# Altium PCB RT_SUPER_HOST_A.PCBdoc
Units mil, origin at the board's own origin, x right, y up, seen from the top; angles counter-clockwise.
Board outline 6500 x 5500 mil, 4 copper layers (Top Layer, GND, PWR, Bottom Layer), stack 39.556 mil thick; 92 components, 54 nets, 340 pads, 0 vias.
Unrouted connection lines stored in the file: 202.
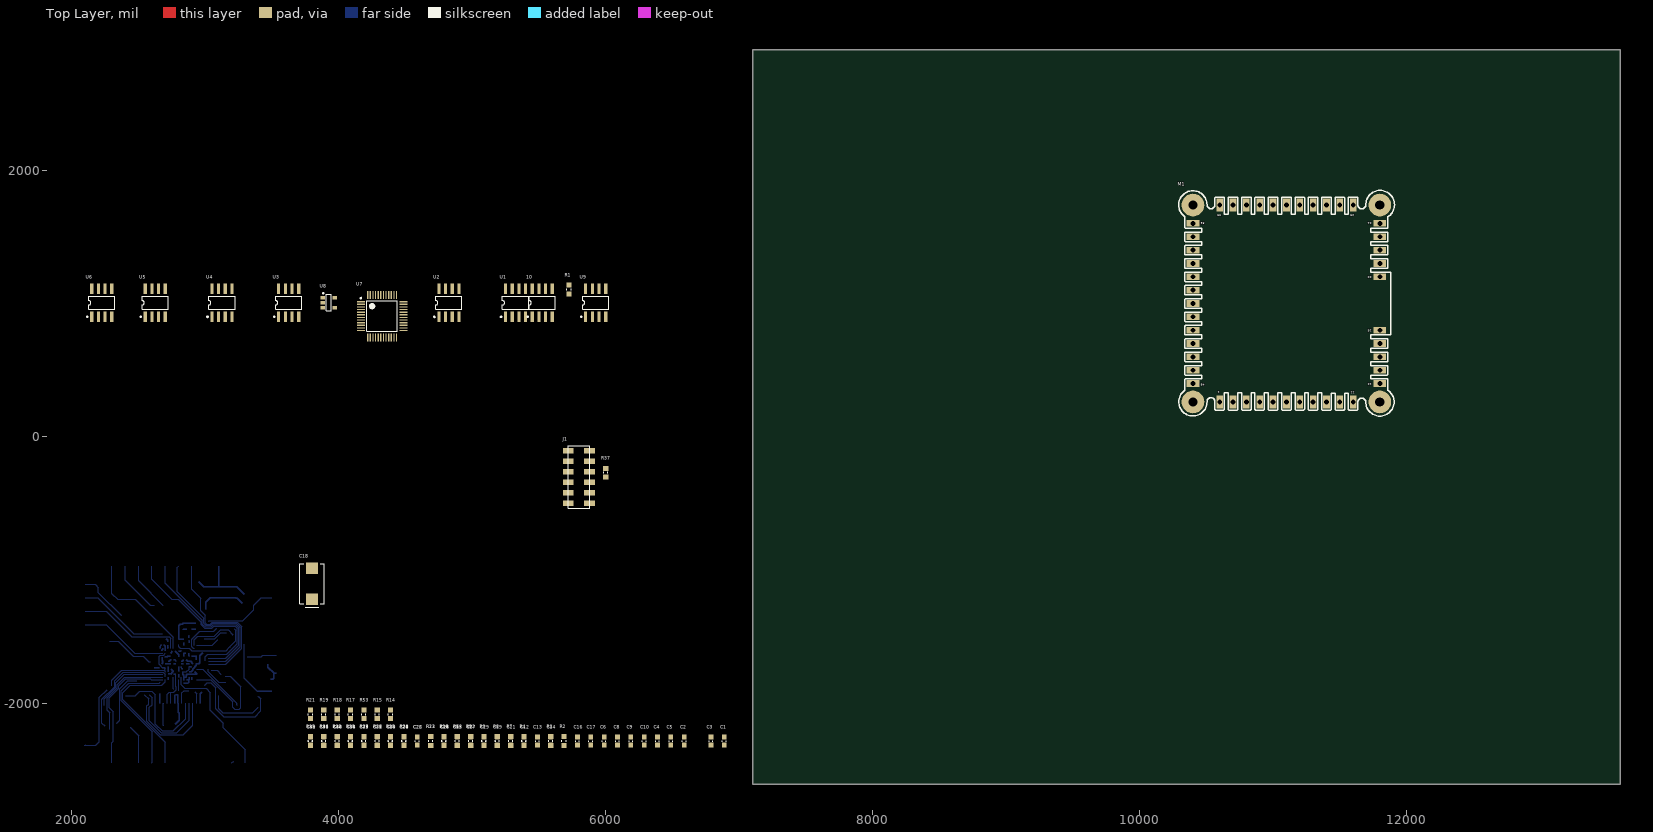
[diagram p0: Top Layer view]
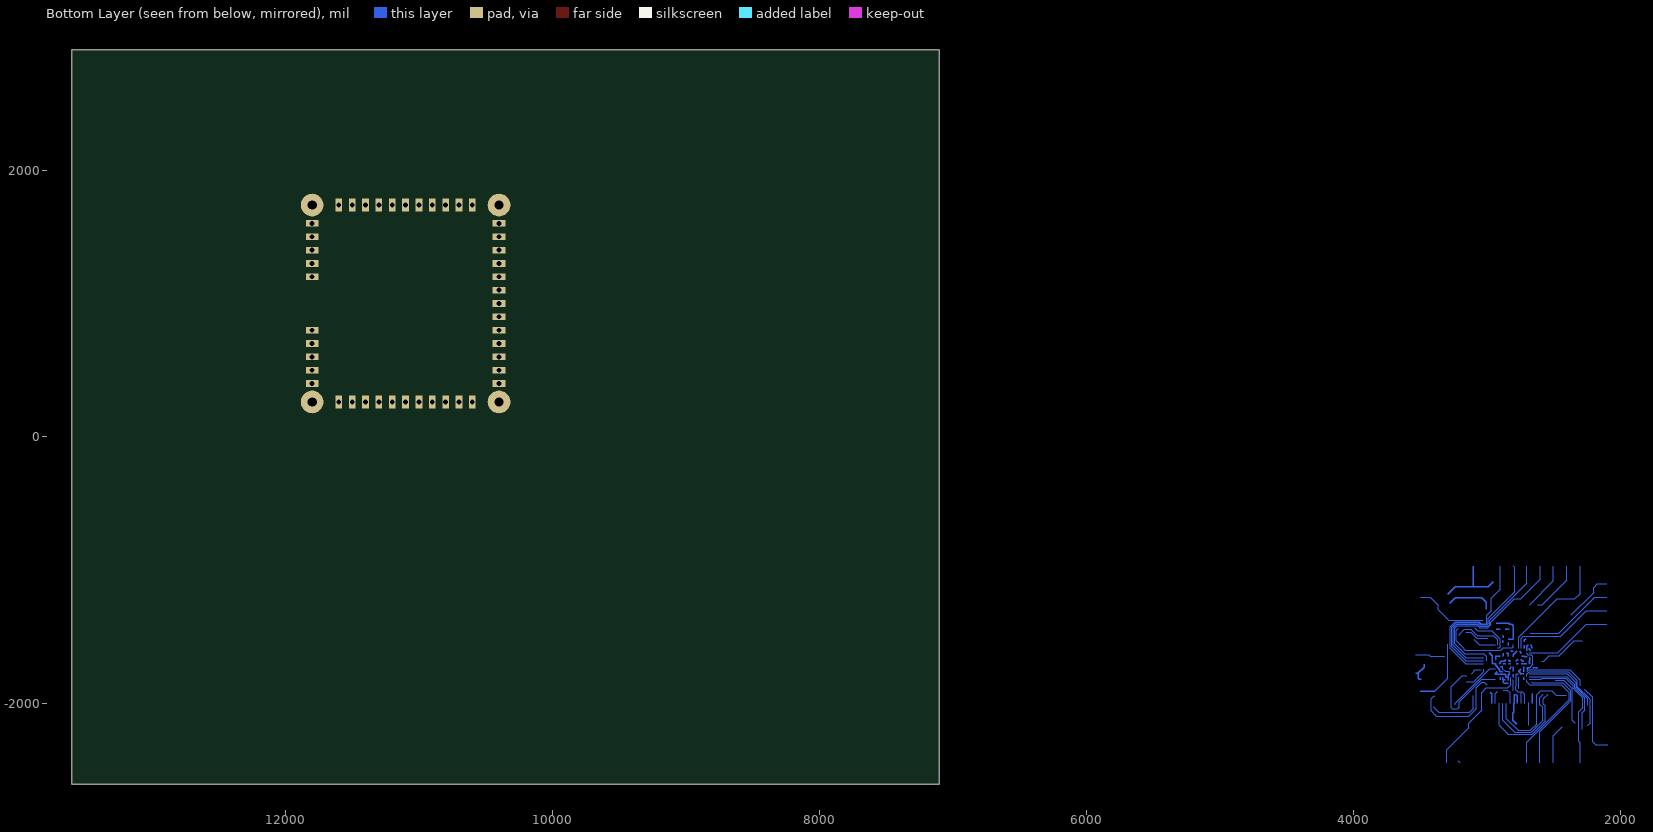
[diagram p1: Bottom Layer view, seen from below]
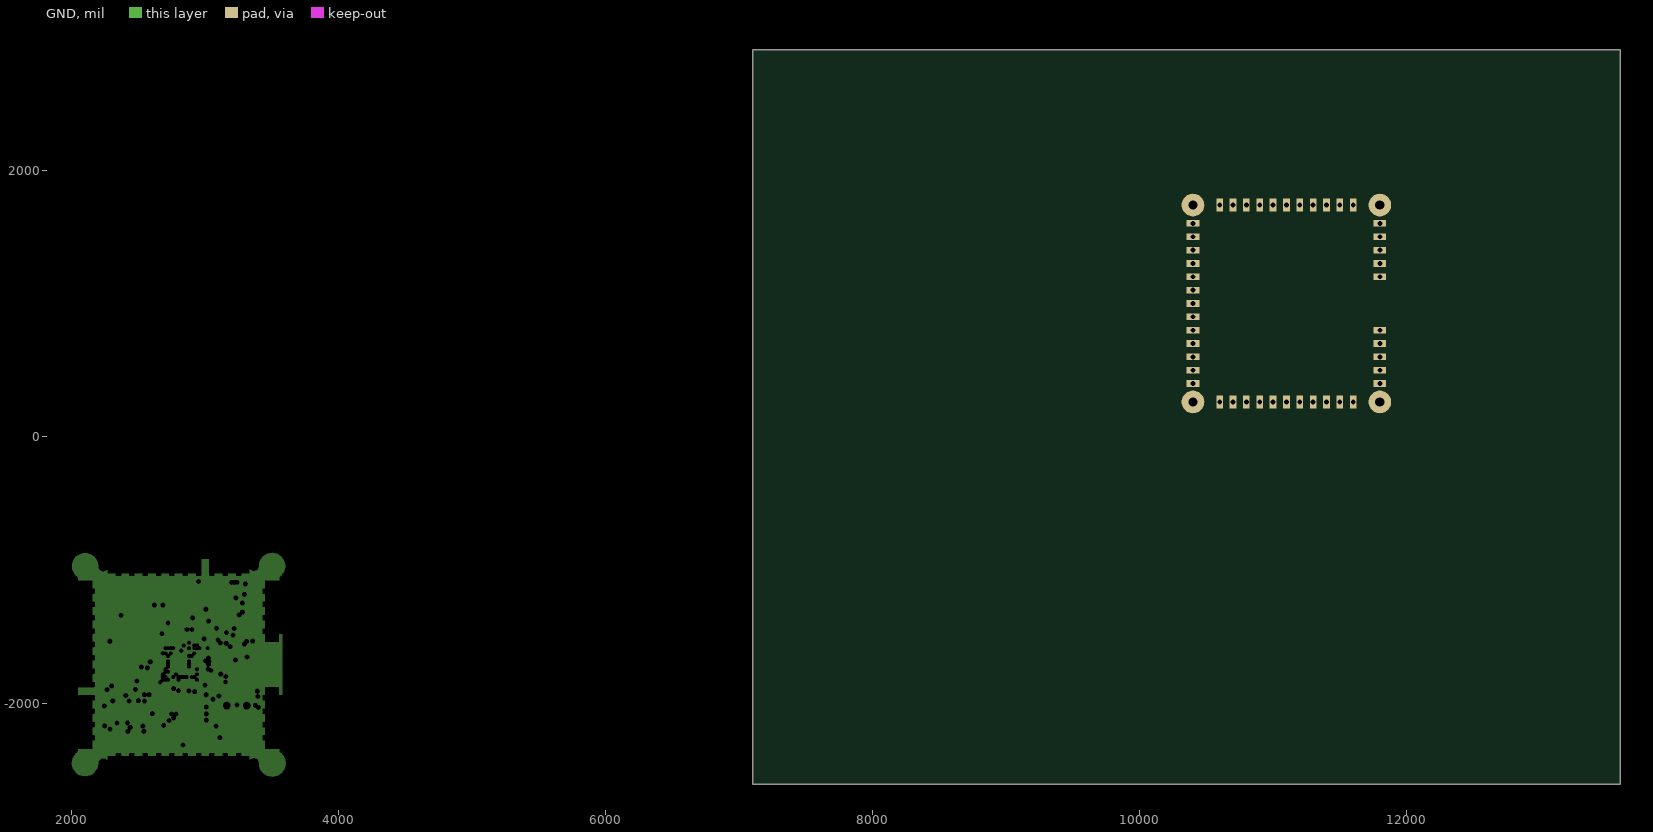
[diagram p2: GND]
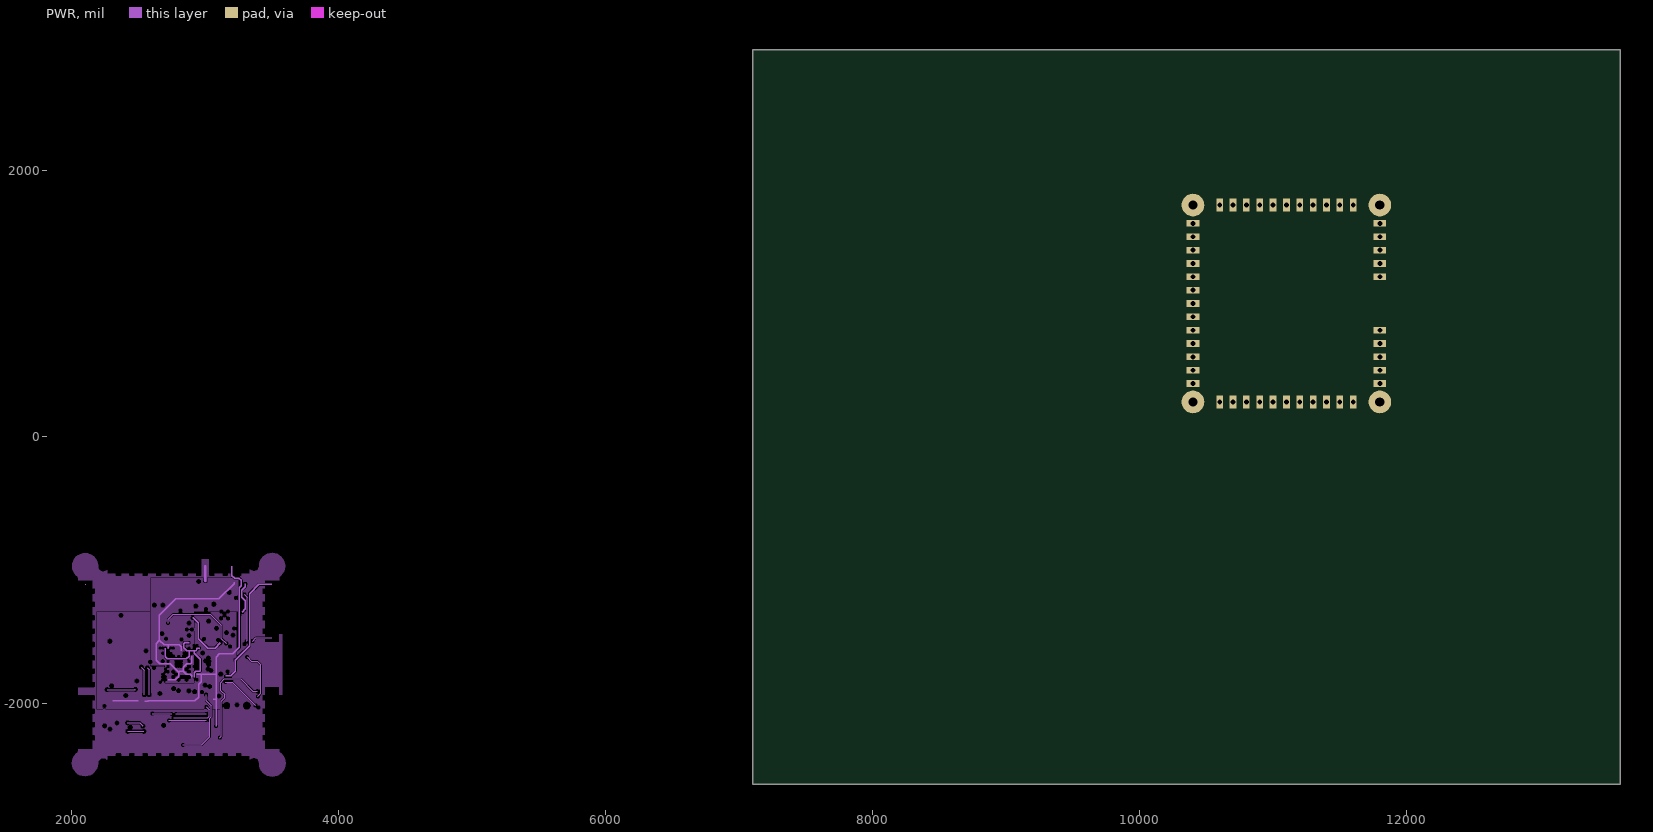
[diagram p3: PWR]

## Layer stack, top to bottom
Top Solder: solder mask 0.4, Solder Resist, Dk 3.5
Top Layer: signal copper 1.4
Dielectric 1: prepreg 2.8, PP-006, Dk 4.1
GND: signal copper 1.378
Dielectric1: dielectric 28.4, FR-4, Dk 4.8
PWR: signal copper 1.378
Dielectric 2: prepreg 2.8, PP-006, Dk 4.1
Bottom Layer: signal copper 1.4
Bottom Solder: solder mask 0.4, Solder Resist, Dk 3.5

## Board outline
7100,-2600 13600,-2600 13600,2900 7100,2900

## Design rules (kind name [scope] priority, off if disabled: settings)
Clearance [All] p1: gap=5 ignorepadtopadclearanceinfootprint=FALSE except(8: Arc-Poly Track-Poly SMDPad-Poly THPad-Poly Via-Poly Fill-Poly Poly-Poly)
ComponentClearance ComponentClearance_1 [HasFootprint('ER-TFT1.54-1')] p1: gap=0 collisioncheckmode=3 verticalgap=0 showdistances=FALSE
ComponentClearance [All] p2: gap=10 collisioncheckmode=3 verticalgap=10 showdistances=FALSE
PlaneClearance [All] p1: clearance=10
PolygonConnect PolygonConnect_2 [InNet('GND')] p1: thpad.connectstyle=Direct thpad.reliefconductorwidth=10 thpad.reliefentries=4 thpad.polygonreliefangle="90 Angle" thpad.airgapwidth=10 smdpad.connectstyle=Relief smdpad.reliefconductorwidth=10 smdpad.reliefentries=4 smdpad.polygonreliefangle="90 Angle" smdpad.airgapwidth=10 via.connectstyle=Direct via.reliefconductorwidth=10 via.reliefentries=4 via.polygonreliefangle="90 Angle" via.airgapwidth=10
PolygonConnect PolygonConnect_1 [IsVia] p2: connectstyle=Direct reliefconductorwidth=10 reliefentries=4 polygonreliefangle="90 Angle" airgapwidth=10
PolygonConnect [All] p3: connectstyle=Relief reliefconductorwidth=10 reliefentries=4 polygonreliefangle="90 Angle" airgapwidth=5
RoutingVias [All] p1: holewidth=12 width=26 viastyle="Through Hole" minholewidth=6 minwidth=6 maxholewidth=50 maxwidth=75
SilkToSolderMaskClearance SilkscreenOverComponentPads [IsPad] p1: minsilkscreentomaskgap=10 clearancetoexposedcopper=TRUE
SolderMaskExpansion [All] p1: expansion=4 istentingtop=FALSE
Width [All] p1: maxlimit=200 minlimit=5 preferedwidth=5
27 further rules are at their usual default settings.

## Classes and differential pairs
component class U_ADC_IN: 10 C1 C2 C3 C4 C5 C6 C8 C9 C10 C11 C12 C13 C14 C15 C16 C17 C18 C19 C20 C21 C22 C23 C24 C25 C26 C27 C28 C29 C30 C31 C32 C33 C34 C35 C36 C37 C38 C39 C40 C41 C42 R1 R2 R3 R4 R7 R8 R9 R12 R13 R14 R15 R16 R17 R18 R19 R21 R23 R24 R25 R28 R29 R30 R33 R34 R35 R37 R53 U1 U2 U3 U4 U5 U6 U7 U8 U9
component class RT_SUPER_HOST_A: J1 M1

## Components (designator, comment, footprint, x,y, rotation, side; value= is the part's Value field where it differs from the comment)
10 "OPA2340UA/2K5" "SOIC 8" 5525,1005.31 r0 top
C1 "1000pF" C0603_0.90MM_MD 6888.44,-2278.04 r90 top
C2 "0.1µF" C0603_0.90MM_MD 6588.44,-2278.04 r90 top
C3 "0.1µF" C0603_0.90MM_MD 6788.44,-2278.04 r90 top
C4 "0.1µF" C0603_0.90MM_MD 6388.44,-2278.04 r90 top
C5 "0.1µF" C0603_0.90MM_MD 6488.44,-2278.04 r90 top
C6 "0.1µF" C0603_0.90MM_MD 5988.44,-2278.04 r90 top
C7 "2000pF" C0603_MD 4988.44,-2278.04 r90 top
C8 "0.1µF" C0603_0.90MM_MD 6088.44,-2278.04 r90 top
C9 "0.1µF" C0603_0.90MM_MD 6188.44,-2278.04 r90 top
C10 "0.1µF" C0603_0.90MM_MD 6288.44,-2278.04 r90 top
C11 "0.1µF" C0603_0.90MM_MD 5288.44,-2278.04 r90 top
C12 "0.1µF" C0603_0.90MM_MD 5388.44,-2278.04 r90 top
C13 "0.1µF" C0603_0.90MM_MD 5488.44,-2278.04 r90 top
C14 "0.1µF" C0603_0.90MM_MD 5588.44,-2278.04 r90 top
C15 "2000pF" C0603_MD 4888.44,-2278.04 r90 top
C16 "0.1µF" C0603_0.90MM_MD 5788.44,-2278.04 r90 top
C17 "0.1µF" C0603_0.90MM_MD 5888.44,-2278.04 r90 top
C18 "220µF" C_TANT_D_HD 3800,-1100 r90 top
C19 "10000pF" C0603_0.90MM_MD 5188.44,-2278.04 r90 top
C20 "10000pF" C0603_0.90MM_MD 4388.44,-2278.04 r90 top
C21 "0.1µF" C0603_0.90MM_MD 4488.44,-2278.04 r90 top
C22 "1µF" C0603_0.90MM_MD 4588.44,-2278.04 r90 top
C23 "10000pF" C0603_0.90MM_MD 4788.44,-2278.04 r90 top
C24 "2000pF" C0603_MD 4788.44,-2278.04 r90 top
C25 "0.1µF" C0603_0.90MM_MD 4888.44,-2278.04 r90 top
C26 "2000pF" C0603_MD 4588.44,-2278.04 r90 top
C27 "0.1µF" C0603_0.90MM_MD 4988.44,-2278.04 r90 top
C28 "2000pF" C0603_MD 4488.44,-2278.04 r90 top
C29 "10000pF" C0603_0.90MM_MD 5088.44,-2278.04 r90 top
C30 "2000pF" C0603_MD 4388.44,-2278.04 r90 top
C31 "2000pF" C0603_MD 4288.44,-2278.04 r90 top
C32 "10000pF" C0603_0.90MM_MD 4288.44,-2278.04 r90 top
C33 "2000pF" C0603_MD 4188.44,-2278.04 r90 top
C34 "2000pF" C0603_MD 4088.44,-2278.04 r90 top
C35 "0.1µF" C0603_0.90MM_MD 4188.44,-2278.04 r90 top
C36 "2000pF" C0603_MD 3988.44,-2278.04 r90 top
C37 "2000pF" C0603_MD 3888.44,-2278.04 r90 top
C38 "10000pF" C0603_0.90MM_MD 4088.44,-2278.04 r90 top
C39 "2000pF" C0603_MD 3788.44,-2278.04 r90 top
C40 "10000pF" C0603_0.90MM_MD 3988.44,-2278.04 r90 top
C41 "10000pF" C0603_0.90MM_MD 3888.44,-2278.04 r90 top
C42 "10000pF" C0603_0.90MM_MD 3788.44,-2278.04 r90 top
J1 "87759-1250" 87759-1250 5800,-300 r90 top
M1 "SUPERMONKEY" SUPERMONKEY 11100,1000 r180 top
R1 "4.7M" R0603_MD 5725,1105.31 r90 top
R2 "51" R0603_MD 5688.44,-2278.04 r90 top
R3 "100k" R0603_MD 5588.44,-2278.04 r90 top
R4 "51" R0603_MD 5388.44,-2278.04 r90 top
R5 "4.7M" R0603_MD 4988.44,-2278.04 r90 top
R6 "4.7M" R0603_MD 4888.44,-2278.04 r90 top
R7 "51" R0603_MD 5288.44,-2278.04 r90 top
R8 "100k" R0603_MD 5188.44,-2278.04 r90 top
R9 "51" R0603_MD 5088.44,-2278.04 r90 top
R10 "4.7M" R0603_MD 4788.44,-2278.04 r90 top
R11 "4.7M" R0603_MD 4688.44,-2278.04 r90 top
R12 "51" R0603_MD 4988.44,-2278.04 r90 top
R13 "100k" R0603_MD 4888.44,-2278.04 r90 top
R14 "1k" R0603_MD 4388.44,-2078.04 r90 top
R15 "1k" R0603_MD 4288.44,-2078.04 r90 top
R16 "51" R0603_MD 4788.44,-2278.04 r90 top
R17 "1k" R0603_MD 4088.44,-2078.04 r90 top
R18 "1k" R0603_MD 3988.44,-2078.04 r90 top
R19 "1k" R0603_MD 3888.44,-2078.04 r90 top
R20 "4.7M" R0603_MD 4488.44,-2278.04 r90 top
R21 "1k" R0603_MD 3788.44,-2078.04 r90 top
R22 "4.7M" R0603_MD 4388.44,-2278.04 r90 top
R23 "51" R0603_MD 4688.44,-2278.04 r90 top
R24 "100k" R0603_MD 4488.44,-2278.04 r90 top
R25 "51" R0603_MD 4388.44,-2278.04 r90 top
R26 "4.7M" R0603_MD 4288.44,-2278.04 r90 top
R27 "4.7M" R0603_MD 4188.44,-2278.04 r90 top
R28 "51" R0603_MD 4288.44,-2278.04 r90 top
R29 "100k" R0603_MD 4188.44,-2278.04 r90 top
R30 "51" R0603_MD 4088.44,-2278.04 r90 top
R31 "4.7M" R0603_MD 4088.44,-2278.04 r90 top
R32 "4.7M" R0603_MD 3988.44,-2278.04 r90 top
R33 "51" R0603_MD 3988.44,-2278.04 r90 top
R34 "100k" R0603_MD 3888.44,-2278.04 r90 top
R35 "51" R0603_MD 3788.44,-2278.04 r90 top
R36 "4.7M" R0603_MD 3888.44,-2278.04 r90 top
R37 "4.7M" R0603_MD 6000,-267.52 r90 top
R53 "1k" R0603_MD 4188.44,-2078.04 r90 top
U1 "OPA2340UA/2K5" "SOIC 8" 5325,1005.31 r0 top
U2 "OPA2340UA/2K5" "SOIC 8" 4825,1005.31 r0 top
U3 "OPA2340UA/2K5" "SOIC 8" 3625,1005.31 r0 top
U4 "OPA2340UA/2K5" "SOIC 8" 3125,1005.31 r0 top
U5 "OPA2340UA/2K5" "SOIC 8" 2625,1005.31 r0 top
U6 "OPA2340UA/2K5" "SOIC 8" 2225,1005.31 r0 top
U7 "CS5366-DQZ" TSQFP50P900X900X145-48L 4325,905.31 r0 top
U8 "SN74AHC1G125DBVR" SOT23-5 3925,1005.31 r0 top
U9 "OPA2340UA/2K5" "SOIC 8" 5925,1005.31 r0 top

## Footprints (in the part's own frame and the unit in brackets; to place one, negate y for a bottom-side part, rotate by r counter-clockwise, add the part's x,y. Pads: shape width x height; smd on the part's side, far side on the other; paste and mask are expansions set on the pad)
87759-1250 [mm] "CONN HEADER 12POS 2MM VERT SMD"
  rect 1x2 smd: 1(-5,-2) 2(-5,2) 3(-3,-2) 4(-3,2) 5(-1,-2) 6(-1,2) 7(1,-2) 8(1,2) 9(3,-2) 10(3,2) 11(5,-2) 12(5,2)
  round 0 hole 1.2 unplated: M1(-4,0) M2(4,0)
  silkscreen extent -5.92,-2.02 5.97,2.03, body extent -5.92,-2.75 5.98,2.75, height 6.45
C0603_0.90MM_MD [mm] "Capacitor 0603 - Medium Density"
  rect 0.95x0.9 smd: 1(-0.775,0) 2(0.775,0)
  silkscreen extent -0.1,-0.35 0.1,0.35, body extent -0.8,-0.4 0.8,0.4, height 0.9
C0603_MD [mm] "Capacitor 0603 - Medium Density"
  rect 0.95x0.9 smd: 1(-0.775,0) 2(0.775,0)
  silkscreen extent -0.1,-0.35 0.1,0.35, body extent -0.8,-0.4 0.8,0.4, height 0.56
C_TANT_D_HD [mm] "Molded Capacitor, 2-Leads, Body 7.3x4.3mm, IPC High Density"
  rect 2.2x2.35 smd: 1(-2.925,0) 2(2.925,0)
  silkscreen extent -4.44,-2.3 3.8,2.3, body extent -3.65,-2.15 3.65,2.15, height 2.8
R0603_MD [mm] "0603 Resistor - Medium Density"
  rect 0.95x1 smd: 1(-0.825,0) 2(0.825,0)
  silkscreen extent -0.15,-0.4 0.15,0.4, body extent -0.8,-0.4 0.8,0.4, height 0.46
"SOIC 8" [mm]
  rect 0.6x2.05 smd: 1(-1.905,-2.675) 2(-0.635,-2.675) 3(0.635,-2.675) 4(1.905,-2.675) 5(1.905,2.675) 6(0.635,2.675) 7(-0.635,2.675) 8(-1.905,2.675)
  silkscreen extent -2.88,-2.8 2.5,1.25, body extent -2.49,-3.19 2.51,3.14, height 1.88
SOT23-5 [mm] "SOT23, 5-Leads, Body 3.1x2.6mm (max), Pitch 0.95mm, IPC High Density"
  rect 0.85x0.6 smd: 1(-1.125,0.95) 2(-1.125,0) 3(-1.125,-0.95) 4(1.125,-0.95) 5(1.125,0.95)
  silkscreen extent -1.15,-1.5 0.5,1.92, body extent -1.38,-1.45 1.32,1.45, height 1.15
SUPERMONKEY [mil]
  rect 50x95 hole 36: 1(500,737.5) 2(400,737.5) 3(300,737.5) 4(200,737.5) 5(100,737.5) 6(0,737.5) 7(-100,737.5) 8(-200,737.5) 9(-300,737.5) 10(-400,737.5) 11(-500,737.5) 25(-500,-737.5) 26(-400,-737.5) 27(-300,-737.5) 28(-200,-737.5) 29(-100,-737.5) 30(0,-737.5) 31(100,-737.5) 32(200,-737.5) 33(300,-737.5) 34(400,-737.5) 35(500,-737.5)
  round 170 hole 70: 2(-700,737.5) 2(-700,-737.5) 2(700,737.5) 2(700,-737.5)
  rect 95x50 hole 36: 12(-700,600) 13(-700,500) 14(-700,400) 15(-700,300) 16(-700,200) 20(-700,-200) 21(-700,-300) 22(-700,-400) 23(-700,-500) 24(-700,-600) 36(700,-600) 37(700,-500) 38(700,-400) 39(700,-300) 40(700,-200) 41(700,-100) 42(700,0) 43(700,100) 44(700,200) 45(700,300) 46(700,400) 47(700,500) 48(700,600)
  Top Layer lines w5: 700,-400 696.57,-396.57 ; 505,-732.5 500,-737.5 ; 103,-734.5 100,-737.5 ; -400,-737.5 -409.45,-728.05 ; -686.73,-386.73 -700,-400 ; -697,-303 -700,-300 ; -698.35,401.65 -700,400 ; -699.69,-600.31 -700,-600 ; -699.88,199.88 -700,200
  Top Layer lines w20: 500,737.5 498,735.5
  silkscreen extent -810,-847 807,844
TSQFP50P900X900X145-48L [mm] "TSQFP, 48-Leads, Body 9.1x9.1mm (max), Pitch 0.50mm, IPC High Density"
  rect 1.5x0.25 smd: 1(-4.05,2.75) 2(-4.05,2.25) 3(-4.05,1.75) 4(-4.05,1.25) 5(-4.05,0.75) 6(-4.05,0.25) 7(-4.05,-0.25) 8(-4.05,-0.75) 9(-4.05,-1.25) 10(-4.05,-1.75) 11(-4.05,-2.25) 12(-4.05,-2.75) 25(4.05,-2.75) 26(4.05,-2.25) 27(4.05,-1.75) 28(4.05,-1.25) 29(4.05,-0.75) 30(4.05,-0.25) 31(4.05,0.25) 32(4.05,0.75) 33(4.05,1.25) 34(4.05,1.75) 35(4.05,2.25) 36(4.05,2.75)
  rect 0.25x1.5 smd: 13(-2.75,-4.05) 14(-2.25,-4.05) 15(-1.75,-4.05) 16(-1.25,-4.05) 17(-0.75,-4.05) 18(-0.25,-4.05) 19(0.25,-4.05) 20(0.75,-4.05) 21(1.25,-4.05) 22(1.75,-4.05) 23(2.25,-4.05) 24(2.75,-4.05) 37(2.75,4.05) 38(2.25,4.05) 39(1.75,4.05) 40(1.25,4.05) 41(0.75,4.05) 42(0.25,4.05) 43(-0.25,4.05) 44(-0.75,4.05) 45(-1.25,4.05) 46(-1.75,4.05) 47(-2.25,4.05) 48(-2.75,4.05)
  silkscreen extent -4.17,-2.9 2.9,3.55, body extent -4.5,-4.5 4.5,4.5, height 1.4

## Part data
10 U1 U2 U3 U4 U5 U6 U9: "IC OPAMP GP 5.5MHZ RRO 8SOIC", Current - Input Bias=0.2pA, Current - Output / Channel=50mA, Current - Supply=750µA, Manufacturer="Texas Instruments", Operating Temperature="-40°C ~ 85°C", Package / Case="8-SOIC (0.154\", 3.90mm Width)", Supplier Device Package=8-SOIC, Supplier Part Number 1=296-26254-1-ND, Voltage - Input Offset=150µV, Voltage - Supply, Single/Dual (±)="2.5 V ~ 5.5 V", -3db Bandwidth=-, Amplifier Type="General Purpose", Category="Integrated Circuits (ICs)", ComponentLink1Description=http://www.ti.com/lit/ds/symlink/opa2340.pdf, ComponentLink1URL=http://www.ti.com/lit/ds/symlink/opa2340.pdf, Gain Bandwidth Product=5.5MHz, Manufacturer Part Number=OPA2340UA/2K5, Mounting Type="Surface Mount", Number of Circuits=2, Output Type=Rail-to-Rail, Packaging="Cut Tape (CT)", Pricing 1="1=3.51, 10=3.148, 25=2.8304, 100=2.5742, 250=2.3302, 500=2.0862, 750=1.891, 1000=1.7568 (USD)", RoHS="RoHS Compliant", Slew Rate="6 V/µs", Stock 1=1425, Supplier 1=Digi-Key
C1: library part CL10C102FB8NNNC, "CAP CER 1000PF 50V C0G/NP0 0603", Manufacturer="Samsung Electro-Mechanics", Operating Temperature="-55°C ~ 125°C", Package=0603, Ratings=-, Supplier Part Number 1=1276-6824-1-ND, Temperature Coefficient="C0G, NP0", Tolerance=±1%, Voltage - Rated=50V, Category=Capacitors, ComponentLink1Description="Datasheet (Internal)", ComponentLink1URL=datasheets\Samsung\CL05B153KB5VPNC.pdf.pdf, ComponentLink2Description="Datasheet (External)", ComponentLink2URL=http://www.samsungsem.com/kr/support/product-search/mlcc/__icsFiles/afieldfile/2017/05/25/CL05B153KB5VPNC.pdf, Manufacturer Part Number=CL10C102FB8NNNC, Substitution Notes="1000pF , 50V , ±1% , C0G, NP0 , -55°C ~ 125°C,0603", Supplier 1=Digikey, Thickness (Max)=0.90MM
C2 C3 C4 C5 C6 C8 C9 C10 C11 C12 C13 C14 C16 C17 C21 C25 C27 C35: library part CGA3E2X7R1H104K080AA, "CAP CER 0.1UF 50V X7R 0603", Manufacturer="TDK Corporation", Operating Temperature="-55°C ~ 125°C", Package=0603, Ratings=AEC-Q200, Supplier Part Number 1=445-5666-1-ND, Temperature Coefficient=X7R, Tolerance=±10%, Voltage - Rated=50V, Category=Capacitors, ComponentLink1Description="Datasheet (Internal)", ComponentLink1URL=datasheets\TDK\mlcc_automotive_general_en.pdf, ComponentLink2Description="Datasheet (External)", ComponentLink2URL=https://product.tdk.com/info/en/catalog/datasheets/mlcc_automotive_general_en.pdf, Features=-, Manufacturer Part Number=CGA3E2X7R1H104K080AA, Substitution Notes="0.1µF , 50V , ±10% , X7R , -55°C ~ 125°C , AEC-Q200 , 0603", Supplier 1=Digikey, Thickness (Max)=0.90MM
C7 C15 C24 C26 C28 C30 C31 C33 C34 C36 C37 C39: library part GRM1885C1H202JA01D, "CAP CER 2000PF 50V 5% NP0 0603", Manufacturer="Murata Electronics North America", Operating Temperature="-55°C ~ 125°C", Package="0603 (1608 Metric)", Ratings=-, Sort Value=2000, Sort Value Package=0603_2000, Supplier Package=0603, Supplier Part Number 1=490-1458-1-ND, Temperature Coefficient="C0G- NP0", Tolerance=±5%, Value_Voltage="2000pF  50V", Voltage - Rated=50V, Applications="General Purpose", Capacitance=2000pF, Category=Capacitors, ComponentLink1Description="\\altium.sil.arl.psu.edu\Libraries\datasheets\Murata Electronics North America\GRM1885C1H202JA01%23.pdf", ComponentLink1URL=http://search.murata.co.jp/Ceramy/image/img/A01X/G101/ENG/GRM1555C1HR60WA01-01.pdf, ComponentLink2Description="External Datasheet", ComponentLink2URL=http://psearch.murata.com/capacitor/product/GRM1885C1H202JA01%23.pdf, Features=-, Height - Seated (Max)=-, Lead Spacing=-, Lead Style=-, Manufacturer Part Number=GRM1885C1H202JA01D, Mounting Type="Surface Mount- MLCC", Packaging="Cut Tape (CT)", Pricing="1 = 0.13  ;  10 = 0.09  ;  50 = 0.0518  ;  100 = 0.0428  ;  250 = 0.036  ;  500 = 0.03016  ;  1000 = 0.02475 (USD)", Sales Status=Active, Size / Dimension="0.063\" L x 0.031\" W (1.60mm x 0.80mm)", Stocked=0, Supplier 1=Digi-Key, Thickness=90, Thickness (Max)="0.035\" (0.90mm)"
C18: library part T495D227K010ATE125, "CAP TANT 220UF 10V 10% 2917", ESR (Equivalent Series Resistance)="125 mOhm", Lifetime @ Temp#=-, Manufacturer=Kemet, Operating Temperature="-55°C ~ 125°C", Package="2917 (7343 Metric)", Sort Value=220000000, Sort Value Package=D_220000000, Supplier Package=D, Supplier Part Number 1=399-3881-1-ND, Temperature Coefficient="Temperature Coefficient", Tolerance=±10%, Value_Voltage="220µF  10V  125 mOhm", Voltage - Rated=10V, Capacitance=220µF, Category=Capacitors, ComponentLink1Description="Internal Datasheet", ComponentLink1URL=http://www.kemet.com/datasheets&T495D227K010ATE125, ComponentLink2Description="External Datasheet", ComponentLink2URL=http://www.kemet.com/datasheets&T495D227K010ATE125, F40=T, Features="General Purpose", Height - Seated (Max)="0.122\" (3.10mm)", Lead Spacing=-, Manufacturer Part Number=T495D227K010ATE125, Mounting Type="Surface Mount", Packaging="Cut Tape (CT)", Pricing="1 = 1.68  ;  10 = 1.329  ;  50 = 1.1518  ;  100 = 0.9968  ;  250 = 0.886 (USD)", Sales Status=Active, Size / Dimension="0.287\" L x 0.169\" W (7.30mm x 4.30mm)", Stocked=0, Supplier 1=Digi-Key, Type=Molded
C19 C20 C23 C29 C32 C38 C40 C41 C42: library part CGA3E2X7R1H103K080AA, "CAP CER 10000PF 50V X7R 0603", Manufacturer="TDK Corporation", Operating Temperature="-55°C ~ 125°C", Package=0603, Ratings=AEC-Q200, Supplier Part Number 1=445-5662-1-ND, Temperature Coefficient=X7R, Tolerance=±10%, Voltage - Rated=50V, Category=Capacitors, ComponentLink1Description="Datasheet (Internal)", ComponentLink1URL=datasheets\TDK\mlcc_automotive_general_en.pdf, ComponentLink2Description="Datasheet (External)", ComponentLink2URL=https://product.tdk.com/info/en/catalog/datasheets/mlcc_automotive_general_en.pdf, Features=-, Manufacturer Part Number=CGA3E2X7R1H103K080AA, Substitution Notes="10000pF , 50V , ±10% , X7R , -55°C ~ 125°C , AEC-Q200 , 0603", Supplier 1=Digikey, Thickness (Max)=0.90MM
C22: library part CGA3E1X7R1E105K080AC, "CAP CER 1UF 25V X7R 0603", Manufacturer="TDK Corporation", Operating Temperature="-55°C ~ 125°C", Package=0603, Ratings=AEC-Q200, Supplier Part Number 1=445-6931-1-ND, Temperature Coefficient=X7R, Tolerance=±10%, Voltage - Rated=25V, Category=Capacitors, ComponentLink1Description="Datasheet (Internal)", ComponentLink1URL=datasheets\TDK\mlcc_automotive_general_en.pdf, ComponentLink2Description="Datasheet (External)", ComponentLink2URL=https://product.tdk.com/info/en/catalog/datasheets/mlcc_automotive_general_en.pdf, Features=-, Manufacturer Part Number=CGA3E1X7R1E105K080AC, Substitution Notes="1µF , 25V , ±10% , X7R , -55°C ~ 125°C , AEC-Q200 , 0603", Supplier 1=Digikey, Thickness (Max)=0.90MM
J1: "CONN HEADER 12POS 2MM VERT SMD", Color=Black, Manufacturer="Molex Connector Corporation", Supplier Part Number 1=WM18653-ND, Category="Connectors, Interconnects", ComponentLink1Description=http://www.molex.com/pdm_docs/sd/877591250_sd.pdf, ComponentLink1URL=http://www.molex.com/pdm_docs/sd/877591250_sd.pdf, Connector Type="Header, Unshrouded", Contact Finish=Gold, Contact Finish Thickness="15µin (0.38µm)", Contact Mating Length="0.150\" (3.81mm)", Contact Type="Male Pin", Fastening Type=-, Features="Board Guide", Manufacturer Part Number=87759-1250, Mounting Type="Surface Mount", Number of Positions=12, Number of Positions Loaded=All, Number of Rows=2, Packaging=Tube, Pitch="0.079\" (2.00mm)", Pricing 1="1=2.07, 10=1.823, 100=1.2155, 500=0.9724, 1000=0.80709 (USD)", RoHS="RoHS Compliant", Row Spacing="0.079\" (2.00mm)", Stock 1=1595, Supplier 1=Digi-Key, Termination=Solder
R1 R5 R6 R10 R11 R20 R22 R26 R27 R31 R32 R36 R37: "RES SMD 4.7M OHM 1% 1/10W 0603", Case Code (Imperial)=0603, Case Code (Metric)=1608, Manufacturer=Yageo, Manufacturer Part Number=RC0603FR-074M7L, Max Operating Temperature=155°C, Min Operating Temperature=-55°C, Power Rating=100mW, Resistance=4.7MR, Supplier Part Number 1=311-4.70MHRCT-ND, Temperature Coefficient=100ppm/°C, Tolerance=1%, Voltage Rating=50V, Case/Package=0603, ComponentLink1Description=https://datasheet.ciiva.com/11819/0900766b80f96399-11819362.pdf, ComponentLink1URL=https://datasheet.ciiva.com/11819/0900766b80f96399-11819362.pdf, ComponentLink2Description=https://datasheet.ciiva.com/15189/getdatasheetpartid-328863-15189765.pdf, ComponentLink2URL=https://datasheet.ciiva.com/15189/getdatasheetpartid-328863-15189765.pdf, ComponentLink3Description=https://datasheet.ciiva.com/7746/443971-7746367.pdf, ComponentLink3URL=https://datasheet.ciiva.com/7746/443971-7746367.pdf, Composition="Thick Film", Depth=0.8mm, Height=0.45mm, Lead Free="Lead Free", Length=1.6mm, Military Standard=Not, Number of Pins=2, Packaging="Tape and Reel", Pricing 1="1=0.1, 10=0.015, 100=0.006, 1000=0.00268, 2500=0.00233 (USD)", REACH SVHC="No SVHC", Stock 1=774342, Supplier 1=Digi-Key, Termination=SMD/SMT, Voltage Rating (DC)=50V, Width=0.8mm
R2 R4 R7 R9 R12 R16 R23 R25 R28 R30 R33 R35: library part ERJ-3EKF51R0V, "RES 51 OHM 1/10W 1% 0603 SMD", Limiting Element Voltage=75, Manufacturer="Panasonic Electronic Components", Maximum Overload Voltage=150, Maximum Working Voltage=2.3V, Package="0603 (1608 Metric)", Package Power="0603  (0.1W)", Power (Watts)="0.1W- 1/10W", Sort Value Package=603_51, Supplier Package=603, Supplier Part Number 1=P51.0HCT-ND, Temperature Coefficient=±100ppm/°C, Tolerance=±1%, Category=Resistors, ComponentLink1Description="Internal Datasheet", ComponentLink1URL="\\altium.sil.arl.psu.edu\Libraries\datasheets\Panasonic Electronic Components\AOA0000CE2.pdf", ComponentLink2Description="External Datasheet", ComponentLink2URL=http://industrial.panasonic.com/www-data/pdf/AOA0000/AOA0000CE2.pdf, Composition="Thick Film", Features=-, Height="0.022\" (0.55mm)", Manufacturer Part Number=ERJ-3EKF51R0V, Number of Terminations=2, Packaging="Cut Tape (CT)", Resistance (Ohms)=51, Size / Dimension="0.063\" L x 0.031\" W (1.60mm x 0.80mm)", Sort Value=51, Stocked=0, Supplier 1=Digi-Key
R3 R8 R13 R24 R29 R34: library part ERJ-3EKF1003V, "RES 100K OHM 1/10W 1% 0603 SMD", Limiting Element Voltage=75, Manufacturer="Panasonic Electronic Components", Maximum Overload Voltage=150, Maximum Working Voltage=75.0V, Package="0603 (1608 Metric)", Package Power="0603  (0.1W)", Power (Watts)="0.1W- 1/10W", Sort Value=100000, Sort Value Package=603_100000, Supplier Package=603, Supplier Part Number 1=P100KHCT-ND, Temperature Coefficient=±100ppm/°C, Tolerance=±1%, Category=Resistors, ComponentLink1Description="Internal Datasheet", ComponentLink1URL="\\altium.sil.arl.psu.edu\Libraries\datasheets\Panasonic Electronic Components\AOA0000CE2.pdf", ComponentLink2Description="External Datasheet", ComponentLink2URL=http://industrial.panasonic.com/www-data/pdf/AOA0000/AOA0000CE2.pdf, Composition="Thick Film", Features=-, Height="0.022\" (0.55mm)", Manufacturer Part Number=ERJ-3EKF1003V, Number of Terminations=2, Packaging="Cut Tape (CT)", Resistance (Ohms)=100k, Size / Dimension="0.063\" L x 0.031\" W (1.60mm x 0.80mm)", Stocked=0, Supplier 1=Digi-Key
R14 R15 R17 R18 R19 R21 R53: library part ERJ-3EKF1001V, "RES 1K OHM 1/10W 1% 0603 SMD", Limiting Element Voltage=75, Manufacturer="Panasonic Electronic Components", Maximum Overload Voltage=150, Maximum Working Voltage=10.0V, Package="0603 (1608 Metric)", Package Power="0603  (0.1W)", Power (Watts)="0.1W- 1/10W", Sort Value=1000, Sort Value Package=603_1000, Supplier Package=603, Supplier Part Number 1=P1.00KHCT-ND, Temperature Coefficient=±100ppm/°C, Tolerance=±1%, Category=Resistors, ComponentLink1Description="Internal Datasheet", ComponentLink1URL="\\altium.sil.arl.psu.edu\Libraries\datasheets\Panasonic Electronic Components\AOA0000CE2.pdf", ComponentLink2Description="External Datasheet", ComponentLink2URL=http://industrial.panasonic.com/www-data/pdf/AOA0000/AOA0000CE2.pdf, Composition="Thick Film", Features=-, Height="0.022\" (0.55mm)", Manufacturer Part Number=ERJ-3EKF1001V, Number of Terminations=2, Packaging="Cut Tape (CT)", Resistance (Ohms)=1k, Size / Dimension="0.063\" L x 0.031\" W (1.60mm x 0.80mm)", Stocked=0, Supplier 1=Digi-Key
U7: "Audio A/D Converter ICs 114dB 192kHz 6-Ch ADC w/TDM Interface", Manufacturer="Cirrus Logic", Maximum Operating Temperature="+ 105 C", Minimum Operating Temperature="- 40 C", Operating Supply Voltage="5 V", Package / Case=LQFP-48, Supplier Part Number 1=777-CS5366-DQZ, Supply Voltage - Max="5.25 V", Supply Voltage - Min="4.75 V", Brand="Cirrus Logic", Category="Audio A/D Converter ICs", ComponentLink1Description=http://www.mouser.com/ds/2/76/CirrusLogic_CS5366_F5-356671.pdf, ComponentLink1URL=http://www.mouser.com/ds/2/76/CirrusLogic_CS5366_F5-356671.pdf, Conversion Rate="192 kS/s", Manufacturer Part Number=CS5366-DQZ, Minimum Order Quantity=168, Mounting Style=SMD/SMT, Number of ADC Inputs=6, Number of Converters=1, Packaging=Tube, Pricing 1="168=20.52, 250=18.89, 500=17.91 (AUD)", Product Category="Converters - Analog to Digital (ADC)", Reeling=False, Resolution="24 bit", RoHS="RoHS Compliant", RoHS - Mouser=Y, Series=CS5366, SNR=No, Standard Pack Qty=250, Stock 1=0, Supplier 1=Mouser, Tradename=CS5366
U8: "IC BUS BUFF TRI-ST N-INV SOT235", Current - Output High, Low="8mA, 8mA", Manufacturer="Texas Instruments", Operating Temperature="-40°C ~ 85°C", Package / Case="SC-74A, SOT-753", Supplier Device Package=SOT-23-5, Supplier Part Number 1=296-8744-1-ND, Voltage - Supply="2 V ~ 5.5 V", Category="Integrated Circuits (ICs)", ComponentLink1Description=http://www.ti.com/lit/ds/symlink/sn74ahc1g125.pdf, ComponentLink1URL=http://www.ti.com/lit/ds/symlink/sn74ahc1g125.pdf, Logic Type="Buffer/Line Driver, Non-Inverting", Manufacturer Part Number=SN74AHC1G125DBVR, Mounting Type="Surface Mount", Number of Bits per Element=1, Number of Elements=1, Packaging="Cut Tape (CT)", Pricing 1="1=0.53, 25=0.31, 100=0.25, 250=0.18, 500=0.145, 1000=0.1125 (USD)", RoHS="RoHS Compliant", Stock 1=40446, Supplier 1=Digi-Key

## Nets (pads, with @x,y where several pads share a name; then routed paths per layer and width w, separated by ;. In a path a pad name is that pad's centre, name@x,y a point inside that pad or via, vN(x,y) a via of type N, cw(c..) or ccw(c..) an arc to the next point about the centre after c; other vN are vias at no path point)
+3.3v: C11.2 C12.2 C13.2 C14.2 C16.2 C17.2 C35.2 R15.1 R17.1 R18.1 R53.1 U7.28 U7.33 U7.35 U8.5
+5v_A: C2.2 C3.2 C4.2 C5.2 C6.2 C8.2 C9.2 C20.2 C21.2 C22.2 C23.1 U1.8 U2.8 U3.8 U4.8 U5.8 U6.8 U7.4 U7.9 U7.20 U9.8
+FILT: C18.1 C25.2 U7.6
+VMID: 10.3 U1.5 U2.3 U2.5 U3.3 U3.5 U4.3 U4.5 U5.3 U5.5 U6.3 U6.5 U9.6 U9.7
+VQ: C10.2 C27.2 C29.1 U7.7 U9.5
ADC_LRCLK: M1.47 U7.24
ADC_MCLK: M1.14 U7.23
ADC_RST: M1.39 R53.2 U7.41
ADC_SCLK: M1.48 U7.25
ADC_TDM: M1.46 U8.4
GND: C2.1 C3.1 C4.1 C5.1 C6.1 C8.1 C9.1 C10.1 C11.1 C12.1 C13.1 C14.1 C16.1 C17.1 C18.2 C20.1 C21.1 C22.1 C23.2 C25.1 C27.1 C29.2 C35.1 R14.1 R19.1 R21.1 U1.4 U2.4 U3.4 U4.4 U5.4 U6.4 U7.3 U7.5 U7.8 U7.10 U7.15 U7.16 U7.17 U7.18 U7.19 U7.21 U7.22 U7.29 U7.32 U8.1 U8.3 U9.4
Net10_1: 10.1 C7.2 R1.2 U7.43
Net10_2: 10.2 C7.1 C19.2 R1.1 R2.2 R3.2
NetC15_1: C15.1 C19.1 R3.1 R4.2 R6.1 U1.6
NetC15_2: C15.2 R6.2 U1.7 U7.44
NetC24_1: C24.1 C32.2 R7.2 R8.2 R10.1 U2.2
NetC24_2: C24.2 R10.2 U2.1 U7.45
NetC26_1: C26.1 C32.1 R8.1 R9.2 R11.1 U2.6
NetC26_2: C26.2 R11.2 U2.7 U7.46
NetC28_1: C28.1 C38.2 R12.2 R13.2 R20.1 U3.2
NetC28_2: C28.2 R20.2 U3.1 U7.47
NetC30_1: C30.1 C38.1 R13.1 R16.2 R22.1 U3.6
NetC30_2: C30.2 R22.2 U3.7 U7.48
NetC31_1: C31.1 C40.2 R23.2 R24.2 R26.1 U4.2
NetC31_2: C31.2 R26.2 U4.1 U7.1
NetC33_1: C33.1 C40.1 R24.1 R25.2 R27.1 U4.6
NetC33_2: C33.2 R27.2 U4.7 U7.2
NetC34_1: C34.1 C41.2 R28.2 R29.2 R31.1 U5.2
NetC34_2: C34.2 R31.2 U5.1 U7.11
NetC36_1: C36.1 C41.1 R29.1 R30.2 R32.1 U5.6
NetC36_2: C36.2 R32.2 U5.7 U7.12
NetC37_1: C37.1 C42.2 R33.2 R34.2 R36.1 U6.2
NetC37_2: C37.2 R36.2 U6.1 U7.13
NetC39_1: C39.1 C42.1 R34.1 R35.2 R37.1 U6.6
NetC39_2: C39.2 R37.2 U6.7 U7.14
NetJ1_1: J1.1 R2.1
NetJ1_2: J1.2 R4.1
NetJ1_3: J1.3 R7.1
NetJ1_4: J1.4 R9.1
NetJ1_5: J1.5 R12.1
NetJ1_6: J1.6 R16.1
NetJ1_7: J1.7 R23.1
NetJ1_8: J1.8 R25.1
NetJ1_9: J1.9 R28.1
NetJ1_10: J1.10 R30.1
NetJ1_11: J1.11 R33.1
NetJ1_12: J1.12 R35.1
NetR14_2: R14.2 U7.38
NetR15_2: R15.2 U7.37
NetR17_2: R17.2 U7.40
NetR18_2: R18.2 U7.39
NetR19_2: R19.2 U7.42
NetR21_2: R21.2 U7.34
NetU7_30: U7.30 U8.2
pads on no net: 10.4 10.5 10.6 10.7 10.8 C1.1 C1.2 J1.M1 J1.M2 M1.1 M1.2 M1.3 M1.4 M1.5 M1.6 M1.7 M1.8 M1.9 M1.10 M1.11 M1.12 M1.13 M1.15 M1.16 M1.20 M1.21 M1.22 M1.23 M1.24 M1.25 M1.26 M1.27 M1.28 M1.29 M1.30 M1.31 M1.32 M1.33 M1.34 M1.35 M1.36 M1.37 M1.38 M1.40 M1.41 M1.42 M1.43 M1.44 M1.45 R5.1 R5.2 U1.1 U1.2 U1.3 U7.26 U7.27 U7.31 U7.36 U9.1 U9.2 U9.3
copper on no net: | length 41606.8
  PWR w5: 2100,-1105 2103.43,-1101.57 ; 2264.57,-1892.91 2474.96,-1892.91 2476.93,-1890.94 ; 2417.13,-2141.93 2418.11,-2140.94 2510.21,-2140.94 2532.28,-2163.02 2532.28,-2166.54 ; 2420.08,-2204.92 2420.57,-2205.41 2539.67,-2205.41 2540.16,-2205.91 ; 2521,-1724 2544,-1747 2544,-1931 ; 2566,-1730 2580,-1744 2580,-1931 ; 2603.15,-2073.03 2604.13,-2074.02 2746.1,-2074.02 2747.08,-2075 ; 2721.26,-1393.9 2721.26,-1365.35 2759.65,-1326.97 3036.22,-1326.97 3120.87,-1411.61 3120.87,-1510.04 3157.28,-1546.46 ; 2729.13,-2124.21 2730.61,-2122.74 3007.19,-2122.74 3008.66,-2121.26 ; 2763.58,-2104.53 3017.52,-2104.53 3029,-2093.05 3029,-2044.16 3007.68,-2022.83 ; 2833.46,-2308.27 2834.37,-2307.36 2974.13,-2307.36 3035.24,-2246.26 3035.24,-2106.5 3045.24,-2096.5 3045.24,-2013.24 3006.69,-1974.69 3006.69,-1931.3 ; 3000,-1077.95 3002.76,-1077.95 ; 3109.06,-2252.17 3120.87,-2240.35 3120.87,-1978.54 3144.49,-1954.92 3144.49,-1928.35 3115.94,-1899.8 3115.94,-1839.76 3142.52,-1813.19 3265.55,-1813.19 3357.36,-1905 3389.84,-1905 ; 3151.38,-1835.83 3201.57,-1835.83 3375.55,-2009.8 3375.55,-2010.12 ; 3293.11,-1179.33 3316,-1202.22 3316,-1522.02 3309.84,-1528.18 3309.84,-1531.69 ; 3314,-1648.05 3345.03,-1679.09 3388.36,-1679.09 3417.13,-1707.85 3417.13,-1921.46 3394.49,-1944.09 ; 3354.63,-1529.23 3378.86,-1505 3500,-1505
  PWR w6: 2781.07,-2075.98 2782.05,-2075 3007.68,-2075 3008.66,-2074.02
  PWR w10: 2307,-1977.28 2497.72,-1977.28 2499,-1976 ; 2544.83,-1979.17 2570.67,-1979.17 2573.83,-1976 2923,-1976 2950,-1949 2950,-1853.37 2970,-1833.37 2970,-1778.74 ; 2701.57,-1581.89 2701.57,-1621.26 2701.57,-1647.57 2715,-1661 2858.69,-1661 2878.74,-1640.94 2879,-1640.69 2879,-1602.82 2876.77,-1600.59 ; 2721.26,-1818.11 2773.43,-1818.11 2792.73,-1798.81 2799.62,-1798.81 2800,-1798.43 2800,-1763.98 ; 2721.26,-1581.89 2721.26,-1558.27 ; 2819.69,-1601.57 2819.69,-1572.05 2805.91,-1558.27 2721.26,-1558.27 ; 2878.74,-1542.52 2844.86,-1542.52 2839.75,-1547.62 2839.75,-1561.82 2839.37,-1562.2 2839.75,-1562.59 2839.75,-1577.35 2862.99,-1600.59 2876.77,-1600.59 ; 2898.43,-1640.94 2898.43,-1694.14 2892.57,-1700 2878.74,-1700 2861.02,-1700 2836.42,-1724.61 2836.42,-1755.12 2835.43,-1756.1 ; 2899,-1799 2899.06,-1798.94 2899.06,-1787.25 2888.58,-1776.77 2856.1,-1776.77 2835.43,-1756.1 ; 2905.32,-1355.51 2911.22,-1355.51 2948.13,-1392.42 2948.13,-1510.53 3019.49,-1581.89 3074.11,-1581.89 3113,-1543 ; 2918.11,-1798.43 2918.11,-1765.89 2927,-1757 2958.14,-1757 2964,-1751.14 2964,-1667.15 2918.11,-1621.26 2918.11,-1601.57 2919.09,-1600.59 ; 2937.8,-1778.74 2970,-1778.74 ; 2957.48,-1581.89 2937.8,-1581.89 2937.8,-1594.73 2931.94,-1600.59 2919.09,-1600.59 ; 3058,-1965 3076.51,-1965 3080.51,-1969 ; 3080.51,-2166.54 3080.51,-1969 ; 3155.32,-1789.57 3190.75,-1789.57 3225.2,-1755.12 3225.2,-1671.46 3332,-1564.65 3332,-1173.91 3400.91,-1105 3500,-1105 ; 3200,-967.5 3200,-1037.99 3219.29,-1057.28 3252.76,-1057.28 3270.47,-1075 3270.47,-1115.42 3255.02,-1130.87 3255.02,-1329.18 3254.72,-1329.48 3254.72,-1575.98 3206.5,-1624.21 3106,-1624.21 3080.51,-1649.7 3080.51,-1779 ; 3217.32,-1088.78 3215.79,-1090.31 3215.79,-1100.15 3102.17,-1213.78 2777.36,-1213.78 2656.98,-1334.16 2656.98,-1524.12 ; 3277.36,-1312.87 3277.36,-1312.11 3300.98,-1288.49 3300.98,-1228.54 3273,-1200.56 3273,-1148 3300,-1121 3300,-1100.59 ; 2656.98,-1524.12 2632.68,-1548.43 2632.68,-1674.41 2658.27,-1700 2721.26,-1700 2736.02,-1700 2800,-1763.98 ; 2656.98,-1524.12 2691.13,-1558.27 2721.26,-1558.27 ; 2800,-1763.98 2807.87,-1756.1 2835.43,-1756.1 ; 2876.77,-1600.59 2919.09,-1600.59 ; 2970,-1778.74 3080.25,-1778.74 3080.51,-1779 ; 3080.51,-1969 3080.51,-1779
  PWR w20: 3000,-1077.95 3000,-967.5
  Bottom Layer w5: 2100,-2305 2093.78,-2311.22 2179.92,-2311.22 2206.5,-2284.65 2206.5,-1950.98 2264.57,-1892.91 ; 2100,-1405 2257,-1405 2473.26,-1621.26 2681.74,-1621.26 2681.89,-1621.11 ; 2100,-1305 2257.36,-1305 2447.92,-1495.56 2728.56,-1495.56 2740.94,-1507.94 2740.94,-1581.89 ; 2100,-1205 2194.76,-1205 2463.39,-1473.62 2675.98,-1473.62 ; 2100,-1105 2176,-1105 2200,-1129 2200,-1167.91 2368.9,-1336.81 ; 2244.88,-2011.02 2244.88,-1960.39 2330.71,-1874.56 2330.71,-1842.81 2394.52,-1779 2681.63,-1779 2681.89,-1778.74 ; 2245.87,-2164.57 2225,-2143.7 2225,-1965.94 2320.71,-1870.24 2320.71,-1827.91 2384.62,-1764 2686.83,-1764 2700.05,-1777.21 2700.05,-1796.9 ; 2285,-1530.37 2348.37,-1530.37 2460.3,-1642.3 2536.3,-1642.3 2576.83,-1682.83 2585.83,-1682.83 2588,-1685 ; 2286.22,-2189.17 2286.22,-2066.56 2266.54,-2046.87 2266.54,-1952.88 2340.71,-1878.7 2340.71,-1856.14 2398.43,-1798.43 2681.89,-1798.43 ; 2299.11,-1864.46 2300.77,-1862.8 2300.77,-1823.25 2374.8,-1749.21 2691.73,-1749.21 2701.57,-1759.06 ; 2300,-2442.5 2300,-2291.28 2309.84,-2281.44 2309.84,-2057.28 2281.3,-2028.74 2281.3,-1952.26 2350.71,-1882.85 2350.71,-1865.18 2404.43,-1811.45 2588.45,-1811.45 2595,-1818 2681.78,-1818 2681.89,-1818.11 ; 2300,-967.5 2300,-1173 2342.75,-1215.75 2475.2,-1215.75 2760.63,-1501.18 2760.63,-1581.89 ; 2338.39,-2142.91 2360.71,-2120.59 2360.71,-1884.99 2417.75,-1827.95 2487.99,-1827.95 ; 2400,-967.5 2400,-1073.62 2586.42,-1260.04 2618.9,-1260.04 ; 2404.33,-1937.2 2473.8,-1937.2 2507.5,-1903.5 2598.97,-1903.5 2626.77,-1931.3 2626.77,-2150.79 2677.95,-2201.97 2761.61,-2201.97 2852.76,-2110.82 2852.76,-1995.5 ; 2438.03,-2175.39 2500,-2237.37 2500,-2442.5 ; 2500,-967.5 2500,-1078.15 2681.89,-1260.04 ; 2544,-1931 2576,-1963 2576,-2000.77 2561.81,-2014.96 2561.81,-2129.13 2663.19,-2230.51 2836.42,-2230.51 2907.88,-2159.05 2907.88,-1995.5 ; 2580,-1931 2602,-1953 2602,-2004.3 2581.5,-2024.8 2581.5,-2126.5 2670.75,-2215.75 2786.22,-2215.75 2880.32,-2121.65 2880.32,-1995.5 ; 2600,-2442.5 2604.13,-2438.37 2604.13,-2208.96 2370.71,-1975.54 2370.71,-1900.94 2425.98,-1845.67 2654.33,-1845.67 2662.2,-1837.8 ; 2600,-967.5 2600,-1064.96 2749.8,-1214.76 2796.76,-1214.76 2968.31,-1386.31 2968.31,-1405.71 2994.88,-1432.28 3049.02,-1432.28 3064.13,-1417.17 3225.72,-1417.17 3240,-1431.44 3240,-1549 3159.87,-1629.13 3020.47,-1629.13 3001.77,-1647.83 3001.77,-1677.13 ; 2669.89,-1560.24 2669.89,-1560.08 ; 2687.41,-1995.5 2686.81,-1996.1 2686.81,-2159.65 2687.8,-2160.63 ; 2700,-2442.5 2700,-2287.01 2380.71,-1967.72 2380.71,-1917.52 2436.65,-1861.57 2673.86,-1861.57 2701.57,-1833.86 2701.57,-1818.11 ; 2700,-967.5 2700,-1095 2978.31,-1373.31 2978.31,-1401.57 2999.02,-1422.28 3044.87,-1422.28 3059.99,-1407.17 3229.87,-1407.17 3252,-1429.3 3252,-1559 3154.31,-1656.69 3023.43,-1656.69 ; 2760.63,-1798.43 2761.88,-1799.68 2761.88,-1884.75 2763.07,-1885.94 ; 2799.6,-1900.33 2800,-1899.93 2800,-1818.11 ; 2800,-967.5 2791.56,-975.94 2791.56,-1160.56 2988.31,-1357.31 2988.31,-1397.42 3003.17,-1412.28 3040.73,-1412.28 3055.85,-1397.17 3234.01,-1397.17 3263,-1426.16 3263,-1570 3152.33,-1680.67 3026.26,-1680.67 ; 2819.69,-1798.43 2819.69,-1857.48 2845.2,-1883 3005.64,-1883 3038,-1915.36 3038,-2046.27 3136.61,-2144.88 3136.61,-2180.32 3300,-2343.7 3300,-2442.5 ; 2825.2,-1995.5 2825.2,-1916.92 2841.34,-1900.79 2876.02,-1900.79 2877,-1901.77 ; 2831.5,-1439.17 2834.45,-1442.13 ; 2832.48,-1759.24 2858.75,-1759.24 2878.74,-1739.26 2878.74,-1719.69 ; 2900,-967.5 2900,-1141.93 2965,-1206.93 2965,-1301 2998.31,-1334.31 2998.31,-1393.28 3007.31,-1402.28 3036.59,-1402.28 3051.71,-1387.17 3238.15,-1387.17 3274,-1423.02 3274,-1582 3152.37,-1703.63 3025.41,-1703.63 3025.14,-1703.9 ; 2918.11,-1581.89 2917.99,-1581.77 2909.14,-1581.77 2898.43,-1571.06 2898.43,-1515.94 2960.43,-1453.94 3064.14,-1453.94 3084.41,-1433.67 ; 2918.11,-1562.2 2918.11,-1519.88 2943.7,-1494.29 3066.37,-1494.29 3114.6,-1446.06 3172.05,-1446.06 3207.48,-1481.5 3207.48,-1484.45 ; 2920,-1908.59 2935.44,-1924.02 2935.44,-1995.5 ; 2926.97,-1442.13 2928.94,-1440.16 ; 2937.8,-1818.11 3042.13,-1818.11 3207,-1982.98 3207,-2025 3221,-2039 3255.29,-2039 3266.54,-2027.76 3266.54,-1871.54 3189,-1794 3155.33,-1794 3154.76,-1794.57 ; 2937.8,-1739.37 2982.37,-1739.37 3237.37,-1994.37 3237.37,-2006.47 3237.99,-2007.09 ; 2937.8,-1562.2 3052.95,-1562.2 3094.29,-1520.87 3095.04,-1520.87 ; 2991.93,-1512.01 3070.67,-1512.01 3116.93,-1465.75 3158.5,-1465.75 ; 2997.83,-1859.45 3016.01,-1841.28 3040.69,-1841.28 3080,-1880.59 3080,-2036.1 3138.58,-2094.69 3374.8,-2094.69 3417.13,-2052.36 3417.13,-1962.8 3400.39,-1946.06 3396.46,-1946.06 3394.49,-1944.09 ; 3021,-1739 3021.95,-1739.95 3021.95,-1757.95 3099.83,-1835.83 3153.95,-1835.83 ; 3025.72,-1380.08 3028.21,-1377.59 3034.72,-1377.59 3035.15,-1377.17 3281.3,-1377.17 3363.98,-1294.49 3363.98,-1262.01 3421.06,-1204.92 3499.92,-1204.92 3500,-1205 ; 3043.11,-1749.21 3088.1,-1749.21 3115.8,-1776.92 ; 3102.17,-1940.16 3102.17,-2036.61 3132.68,-2067.13 3356.1,-2067.13 3397.44,-2025.79 ; 3184.15,-1573.03 3187.8,-1573.03 3185.15,-1570.39 3229,-1526.54 3229,-1448 3216,-1435 ; 3200,-2442.5 3213,-2429.5 ; 3293.11,-1552.36 3293.11,-1808.27 3389.84,-1905 ; 3314,-1648.05 3418.95,-1648.05 3429.99,-1637.01 3533.27,-1637.01
  Bottom Layer w6: 2679,-1730 2679,-1728.03 2655,-1704.03 2655,-1641.86 2661.75,-1635.11 2687.72,-1635.11 2701.57,-1621.26
  Bottom Layer w7: 2800,-1557.28 2800,-1571 2810.89,-1581.89 2878.74,-1581.89 2897.44,-1600.59 3156.59,-1600.59 3184.15,-1573.03
  Bottom Layer w8: 2714.97,-1995.5 2714.97,-1927.03 2730,-1912 2742,-1912 ; 2742.53,-1995.5 2742.53,-1912.53 2742,-1912 ; 2780.32,-1778.74 2780.32,-1870.32 2783,-1873 2783,-1893 2764,-1912 2742,-1912
  Bottom Layer w10: 2616,-1730.59 2616.3,-1730.3 2654.92,-1730.3 2655,-1730.22 2655,-1730 ; 2659.25,-1996.1 2659.85,-1995.5 2659.85,-1922.83 2660.24,-1922.44 ; 2662.2,-1581.89 2662.2,-1566.09 2668.14,-1560.16 2669.81,-1560.16 2669.89,-1560.08 2669.89,-1558.27 ; 2674.81,-1700 2674.81,-1698.03 2682.07,-1690.77 2682.07,-1681.07 2682,-1681 2682,-1680.46 2677,-1675.46 2677,-1650 ; 2675.41,-1600 2675.41,-1598.19 2681.51,-1592.09 2681.51,-1582.27 2681.89,-1581.89 ; 2679,-1730 2679,-1730.16 2679.08,-1730.24 2691.9,-1730.24 2701.03,-1739.37 2701.57,-1739.37 ; 2693.89,-1558.27 2693.89,-1560.08 2701.19,-1567.38 2701.19,-1581.51 2701.57,-1581.89 2701.57,-1582.43 2699.49,-1584.52 2699.49,-1599.92 2699.41,-1600 ; 2699,-1698 2701,-1700 2721.26,-1700 2722.34,-1700 2723.34,-1699 2741,-1699 ; 2701,-1650 2701,-1648.19 2701.08,-1648.11 2713.55,-1648.11 2720.72,-1640.94 2721.26,-1640.94 ; 2706.5,-1511.02 2719.17,-1523.7 2719.17,-1535.92 2719.25,-1536 2720,-1536 ; 2720,-1560 2720.2,-1560 2720.28,-1560.08 2720.28,-1580.36 2721.26,-1581.35 2721.26,-1581.89 ; 2720.99,-1799 2720.91,-1799.08 2721.13,-1799.08 2721.13,-1817.98 2721.26,-1818.11 2721.26,-1817.57 ; 2721,-1759 2721,-1739 2721.08,-1738.92 2721.08,-1719.87 2721.26,-1719.69 ; 2721.26,-1680.32 2721.64,-1679.93 2731.88,-1679.93 2741,-1670.81 2741,-1669 2741,-1667.19 2740.92,-1667.11 ; 2721.29,-1640.97 2736.97,-1640.97 ; 2722.81,-1775 2721,-1775 2721.08,-1775.08 2739.89,-1775.08 2741,-1776.19 ; 2740.94,-1621.26 2741.33,-1620.88 2741.33,-1618.48 2753,-1606.81 2753,-1605 ; 2741,-1778 2741,-1776.19 ; 2745,-1739 2745,-1740.81 2760.25,-1756.06 2760.25,-1758.67 2760.63,-1759.06 2760.25,-1759.44 2757.61,-1759.44 2748.87,-1768.18 2748.87,-1768.32 2741,-1776.19 ; 2765,-1778 2765,-1778.29 2765.08,-1778.37 2779.94,-1778.37 2780.32,-1778.74 ; 2765,-1699 2765.5,-1699.5 2779.82,-1699.5 2780.32,-1700 ; 2765,-1669 2765,-1670.81 2765.08,-1670.89 2773.38,-1670.89 2779.93,-1677.44 2779.93,-1679.93 2780.32,-1680.32 ; 2770.09,-1995.5 2771.98,-1993.61 2771.98,-1936.56 2777.83,-1930.7 2789.9,-1930.7 2795.76,-1936.56 2795.76,-1993.61 2798.56,-1996.41 2798.56,-2061.75 2805.91,-2069.09 2805.91,-2121.26 2776.38,-2150.79 ; 2777,-1605 2777,-1606.81 2798.11,-1627.92 2800.92,-1627.92 2801,-1628 2801,-1644.87 ; 2800,-1798.43 2800,-1778.74 ; 2800,-1754.74 2800,-1719.69 ; 2800,-1515.94 2800,-1512.01 ; 2801,-1604 2801.08,-1604.08 2815.29,-1604.08 2817.41,-1601.96 2819.3,-1601.96 2819.69,-1601.57 ; 2819.69,-1719.69 2819.69,-1729.39 2825.54,-1735.24 2832.48,-1735.24 ; 2819.69,-1700 2820.19,-1699.5 2833.5,-1699.5 2834,-1699 ; 2819.69,-1680.32 2819.93,-1680.07 2829.14,-1680.07 2835,-1674.22 2835,-1668 ; 2831.5,-1397.83 2827.84,-1401.49 2812.51,-1401.49 2800,-1414 2800,-1512.01 ; 2831.5,-1393.9 2832.48,-1394.88 2878.74,-1394.88 2928.94,-1394.88 ; 2832.48,-1759.24 2832.48,-1779.32 2838.99,-1785.83 2838.99,-1798.04 2839.37,-1798.43 ; 2834.45,-1442.13 2862.01,-1442.13 ; 2838.95,-1639.99 2839.37,-1640.4 2839.37,-1640.94 2839.69,-1640.63 2839.69,-1621.32 2840,-1621 2854,-1621 ; 2839.47,-1562.11 2839.37,-1562.2 2839.37,-1540.9 2839.45,-1540.82 2839.57,-1540.82 ; 2839.57,-1516.82 2839.49,-1516.74 2822.32,-1516.74 2822,-1516.43 2804.42,-1516.43 2800,-1512.01 ; 2840,-1846 2869.93,-1846 2875.79,-1840.14 2875.79,-1822.08 2875.6,-1821.89 2875.6,-1820.08 2875.6,-1818.27 ; 2840,-1822 2839.37,-1821.37 2839.37,-1798.43 ; 2858,-1699 2859,-1700 2878.74,-1700 ; 2859,-1668 2859,-1669.81 2869.12,-1679.93 2878.36,-1679.93 2878.74,-1680.32 2879.12,-1680.7 2891.39,-1680.7 2907.88,-1697.19 2907.88,-1699 ; 2860.04,-1818.11 2869.74,-1818.11 2869.82,-1818.19 2875.52,-1818.19 2875.6,-1818.27 ; 2878,-1621 2878,-1639.66 2878.74,-1640.4 2878.74,-1640.94 ; 2878,-1527.94 2878.29,-1527.94 2878.37,-1528.02 2878.37,-1542.15 2878.74,-1542.52 ; 2878,-1503.94 2878,-1488.14 2878.74,-1487.4 ; 2878.74,-1798.43 2878.74,-1815.13 2875.6,-1818.27 ; 2878.74,-1759.06 2879.23,-1758.56 2897.74,-1758.56 2898.24,-1758.07 2898.24,-1756.26 2907.31,-1747.18 2907.31,-1739.52 2910.8,-1736.03 2910.8,-1735.89 2919.88,-1726.81 2919.88,-1725 2919.88,-1723.19 ; 2878.74,-1719.69 2879.28,-1719.69 2882.71,-1723.11 2895.8,-1723.11 2895.88,-1723.19 2895.88,-1725 ; 2898.43,-1640.94 2933.06,-1640.94 2934,-1640 2934,-1668 ; 2899,-1799 2899,-1799.54 2899.6,-1800.14 2899.6,-1820.08 ; 2899.41,-1442.13 2926.97,-1442.13 ; 2918.11,-1719.69 2918.11,-1721.42 2919.88,-1723.19 ; 2922.24,-1758.07 2922.24,-1759.88 2937.41,-1775.06 2937.41,-1778.36 2937.8,-1778.74 2864.91,-1778.74 2859.44,-1784.22 2859.44,-1798.04 2859.06,-1798.43 2839.37,-1798.43 ; 2931.8,-1699.08 2931.8,-1699.84 ; 2950.59,-1082.87 2988.98,-1121.26 3100,-1121.26 ; 2963,-1995.5 2963,-1924.8 2974.08,-1913.72 2974.08,-1911.75 ; 2980.09,-1618.31 2958.39,-1640 2958,-1640 2958,-1668 2958,-1692 2950,-1700 2931.96,-1700 2931.8,-1699.84 ; 3004.72,-1290.55 3004.72,-1239.37 3039.17,-1204.92 3229.13,-1204.92 3230.66,-1206.45 3239.52,-1206.45 3278.35,-1245.28 ; 3100,-967.5 3100,-1121.26 ; 3293.11,-1179.33 3235.04,-1121.26 3100,-1121.26 ; 3389.84,-1905 3500,-1905 ; 3468.31,-1703.94 3468.94,-1704.57 3468.94,-1724.26 3515.55,-1770.87 ; 3492.13,-1814.06 3505.71,-1814.06 3512,-1807.76 3512,-1774.42 3515.55,-1770.87 ; 3533.27,-1770.87 3515.55,-1770.87 ; 2919.88,-1723.19 2931.8,-1711.27 2931.8,-1699.84

## Polygon pours and split planes (outlines as drawn)
no net on PWR "NONET_L03_P005" (solid, remove dead copper, pour order 5): 1891.54,-792.52 1891.53,-2605.51 3625.79,-2605.51 3625.79,-792.52
no net on PWR "NONET_L03_P003" (solid, remove dead copper, pour order 3): 2190.75,-2034.66 3232.09,-2034.66 3232.09,-1313.19 2190.75,-1313.19
no net on PWR "NONET_L03_P002" (solid, remove dead copper, pour order 2): 2698.62,-1840.75 2698.62,-1711.81 2592.32,-1711.81 2592.32,-1060.24 3247.83,-1060.24 3247.83,-1305.32 2914.17,-1305.32 2914.17,-1502.17 2914.17,-1839.76
no net on GND "NONET_L02_P000" (solid, remove dead copper, pour order 0): 1946.65,-818.11 1946.65,-2631.1 3680.91,-2631.1 3680.91,-818.11

## Silkscreen, mask and mechanical layers (free items; w line width, h text height)
[8] Board Outline:
  the board outline again, w1

## Text inside footprints (layer, text, board x,y; h text height)
M1: Top Overlay "25" at 11610,1675 h30 r180; Top Overlay "36" at 10490,1615 h30 r180; Top Overlay "35" at 10610,1675 h30 r180; Top Overlay "24" at 11740,1615 h30 r180; Top Overlay "20" at 11738,1210 h30 r180; Top Overlay "16" at 11738,811 h30 r180; Top Overlay "12" at 11738,410 h30 r180; Top Overlay "11" at 11613,345 h30 r180; Top Overlay "1" at 10602,350 h30 r180; Top Overlay "48" at 10490,405 h30 r180